# Altium PCB PCB3.PcbDoc
Units mil, origin at the board's own origin, x right, y up, seen from the top; angles counter-clockwise.
Board outline 6000 x 4000 mil, 2 copper layers (Top Layer, Bottom Layer); 1 components, 0 nets, 48 pads, 0 vias.
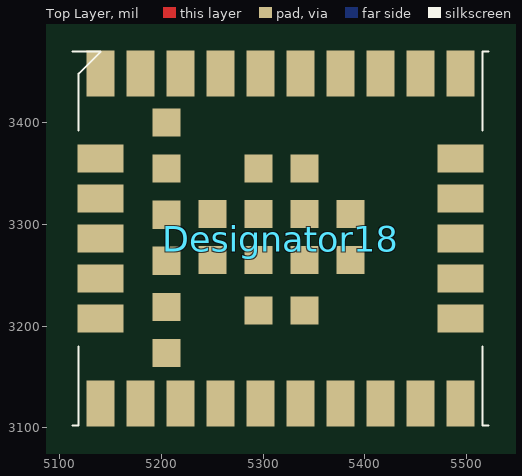
[diagram p0: Top Layer view]
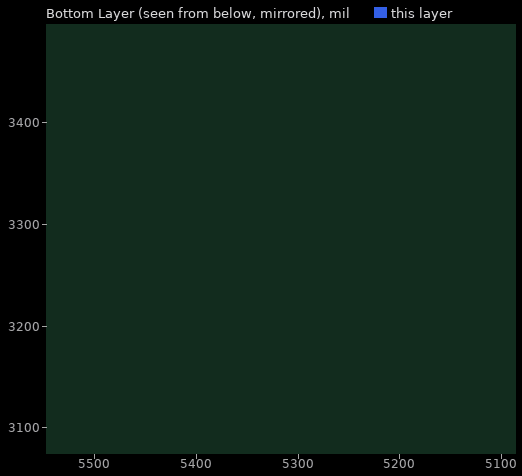
[diagram p1: Bottom Layer view, seen from below]

## Layer stack, top to bottom
Top Solder: solder mask 0.4, Solder Resist, Dk 3.5
Top Layer: signal copper 1.4
Dielectric 1: dielectric 12.6, FR-4, Dk 4.8
Bottom Layer: signal copper 1.4
Bottom Solder: solder mask 0.4, Solder Resist, Dk 3.5

## Board outline
1000,1000 7000,1000 7000,5000 1000,5000

## Design rules (kind name [scope] priority, off if disabled: settings)
Clearance [All] p1: gap=10 ignorepadtopadclearanceinfootprint=FALSE except(0: Arc-Hole Track-Hole SMDPad-Hole THPad-Hole Via-Hole Fill-Hole Poly-Hole Region-Hole Text-Hole)
PolygonConnect [All] p1: connectstyle=Relief reliefconductorwidth=10 reliefentries=4 polygonreliefangle="90 Angle" airgapwidth=10
RoutingVias [All] p1: holewidth=28 width=50 viastyle="Through Hole" minholewidth=28 minwidth=50 maxholewidth=28 maxwidth=50
SolderMaskExpansion [All] p1: expansion=4 istentingtop=FALSE
Width [All] p1: maxlimit=10 minlimit=10 preferedwidth=10
30 further rules are at their usual default settings.

## Components (designator, comment, footprint, x,y, rotation, side; value= is the part's Value field where it differs from the comment)
Designator18 "Comment" NINA-W131 5140,3365 r0 top

## Footprints (in the part's own frame and the unit in brackets; to place one, negate y for a bottom-side part, rotate by r counter-clockwise, add the part's x,y. Pads: shape width x height; smd on the part's side, far side on the other; paste and mask are expansions set on the pad)
NINA-W131 [mm]
  rect 1.15x0.7 smd: 1(0,0) 2(0,-1) 3(0,-2) 4(0,-3) 5(0,-4) 16(9,-4) 17(9,-3) 18(9,-2) 19(9,-1) 20(9,0)
  rect 0.701x0.701 smd: 1(1.651,-0.254) 2(1.651,-1.405) 3(1.651,-2.555) 4(1.651,-3.706) 5(1.651,-4.856) 16(6.253,-2.532) 16(6.253,-1.389) 17(5.103,-3.802) 17(5.103,-2.532) 17(5.103,-1.389) 17(5.103,-0.246) 18(3.952,-3.802) 18(3.952,-2.532) 18(3.952,-1.389) 18(3.952,-0.246) 19(2.802,-2.532) 19(2.802,-1.389) 20(1.651,0.897)
  rect 0.7x1.15 smd: 6(0,-6.125) 7(1,-6.125) 8(2,-6.125) 9(3,-6.125) 10(4,-6.125) 11(5,-6.125) 12(6,-6.125) 13(7,-6.125) 14(8,-6.125) 15(9,-6.125) 21(9,2.125) 22(8,2.125) 23(7,2.125) 24(6,2.125) 25(5,2.125) 26(4,2.125) 27(3,2.125) 28(2,2.125) 29(1,2.125) 30(0,2.125)
  silkscreen extent -0.7,-6.68 9.7,2.67

## Nets (pads, with @x,y where several pads share a name; then routed paths per layer and width w, separated by ;. In a path a pad name is that pad's centre, name@x,y a point inside that pad or via, vN(x,y) a via of type N, cw(c..) or ccw(c..) an arc to the next point about the centre after c; other vN are vias at no path point)
pads on no net: Designator18.1 Designator18.2 Designator18.3 Designator18.4 Designator18.5 Designator18.6 Designator18.7 Designator18.8 Designator18.9 Designator18.10 Designator18.11 Designator18.12 Designator18.13 Designator18.14 Designator18.15 Designator18.16 Designator18.17 Designator18.18 Designator18.19 Designator18.20 Designator18.21 Designator18.22 Designator18.23 Designator18.24 Designator18.25 Designator18.26 Designator18.27 Designator18.28 Designator18.29 Designator18.30